# EAGLE board OpenBook_PCB (EAGLE 9.7.0)
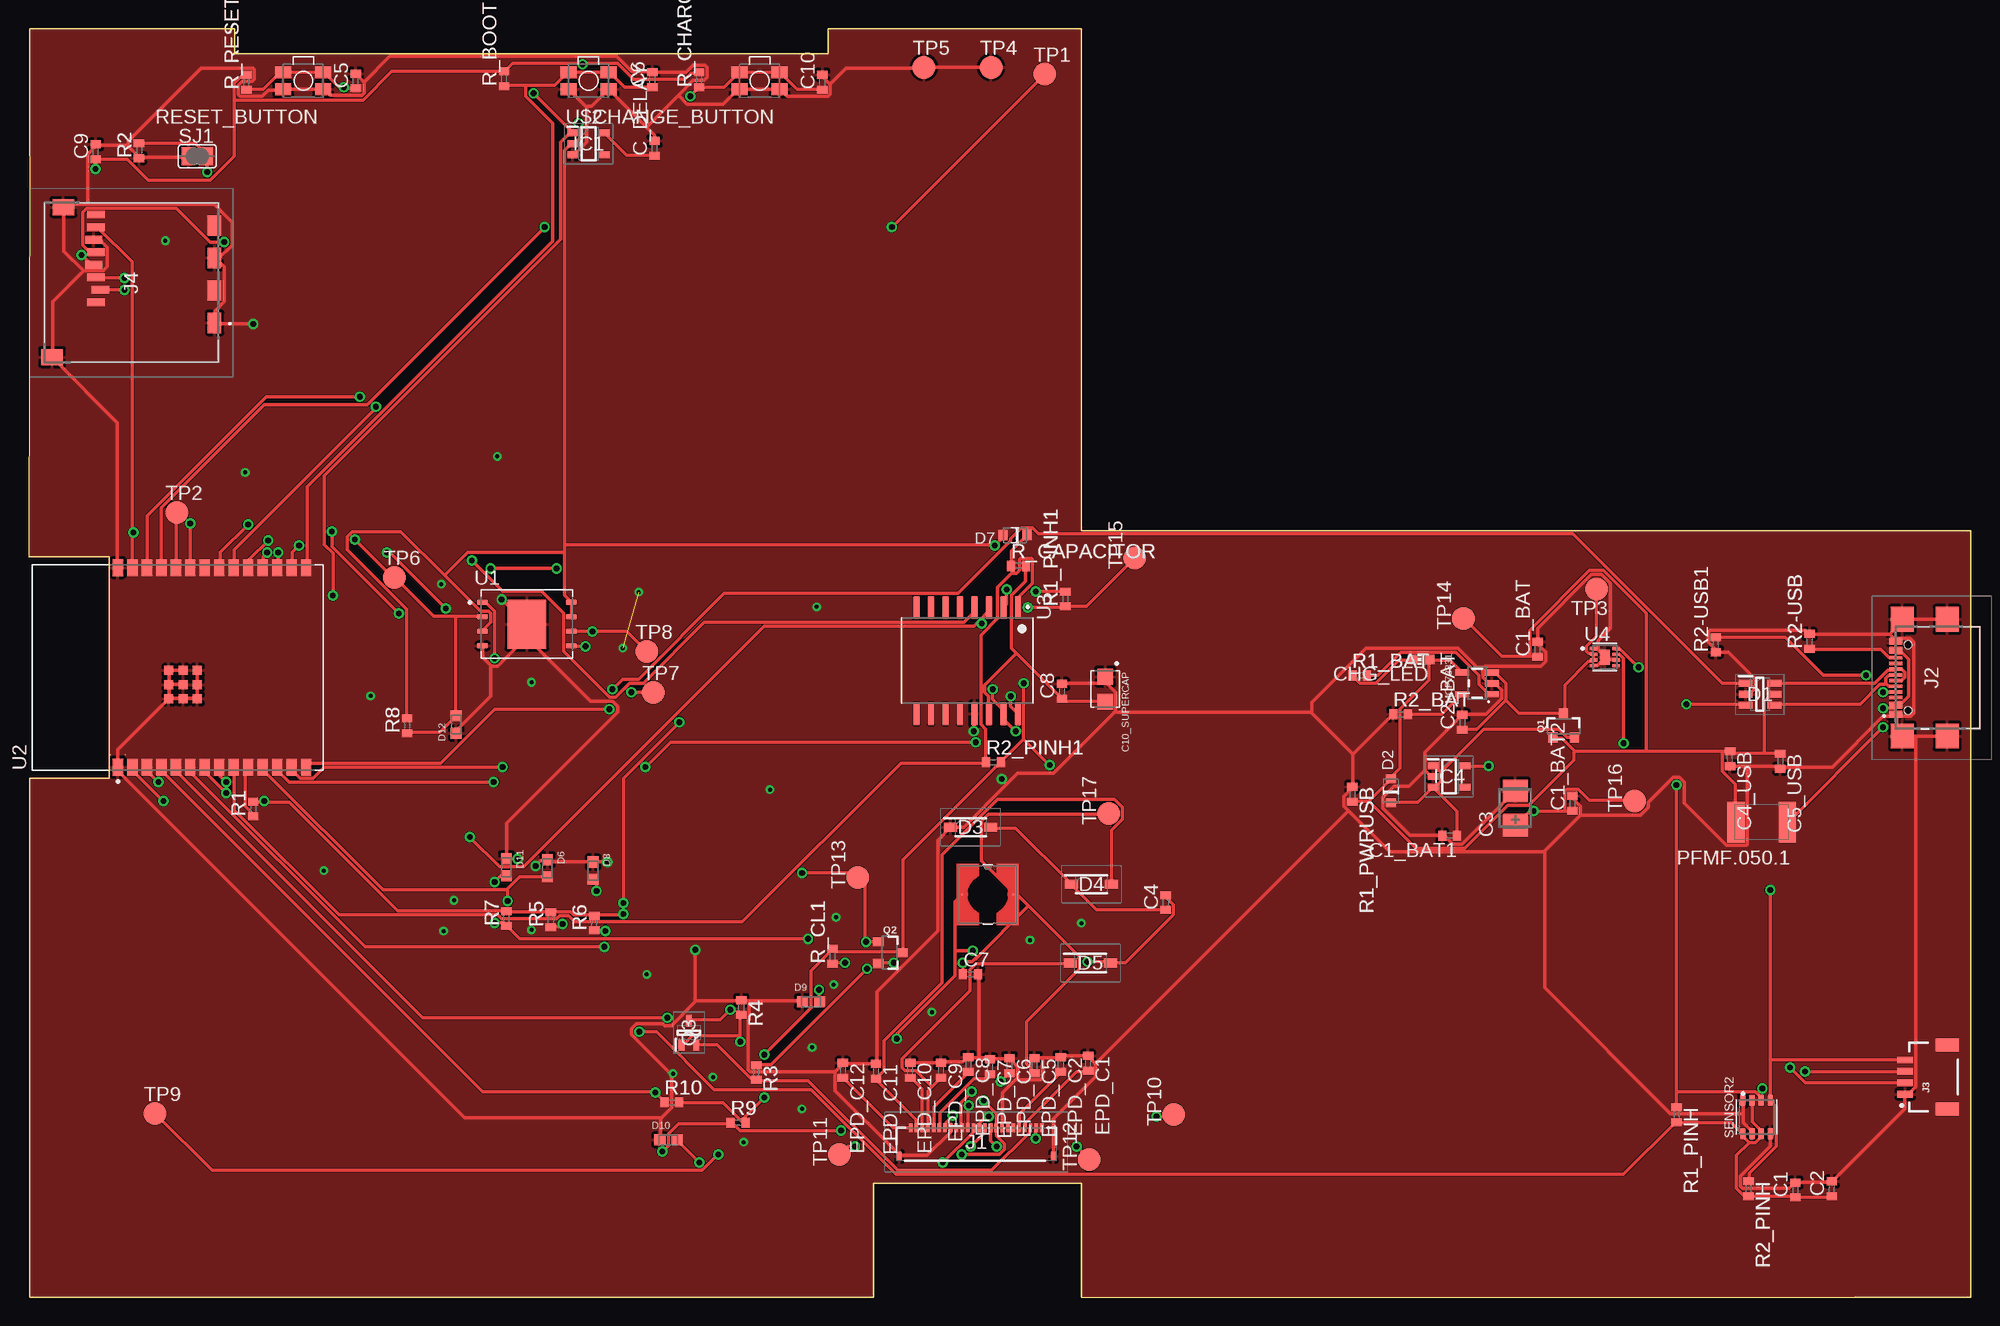
[diagram p0: board, top side]
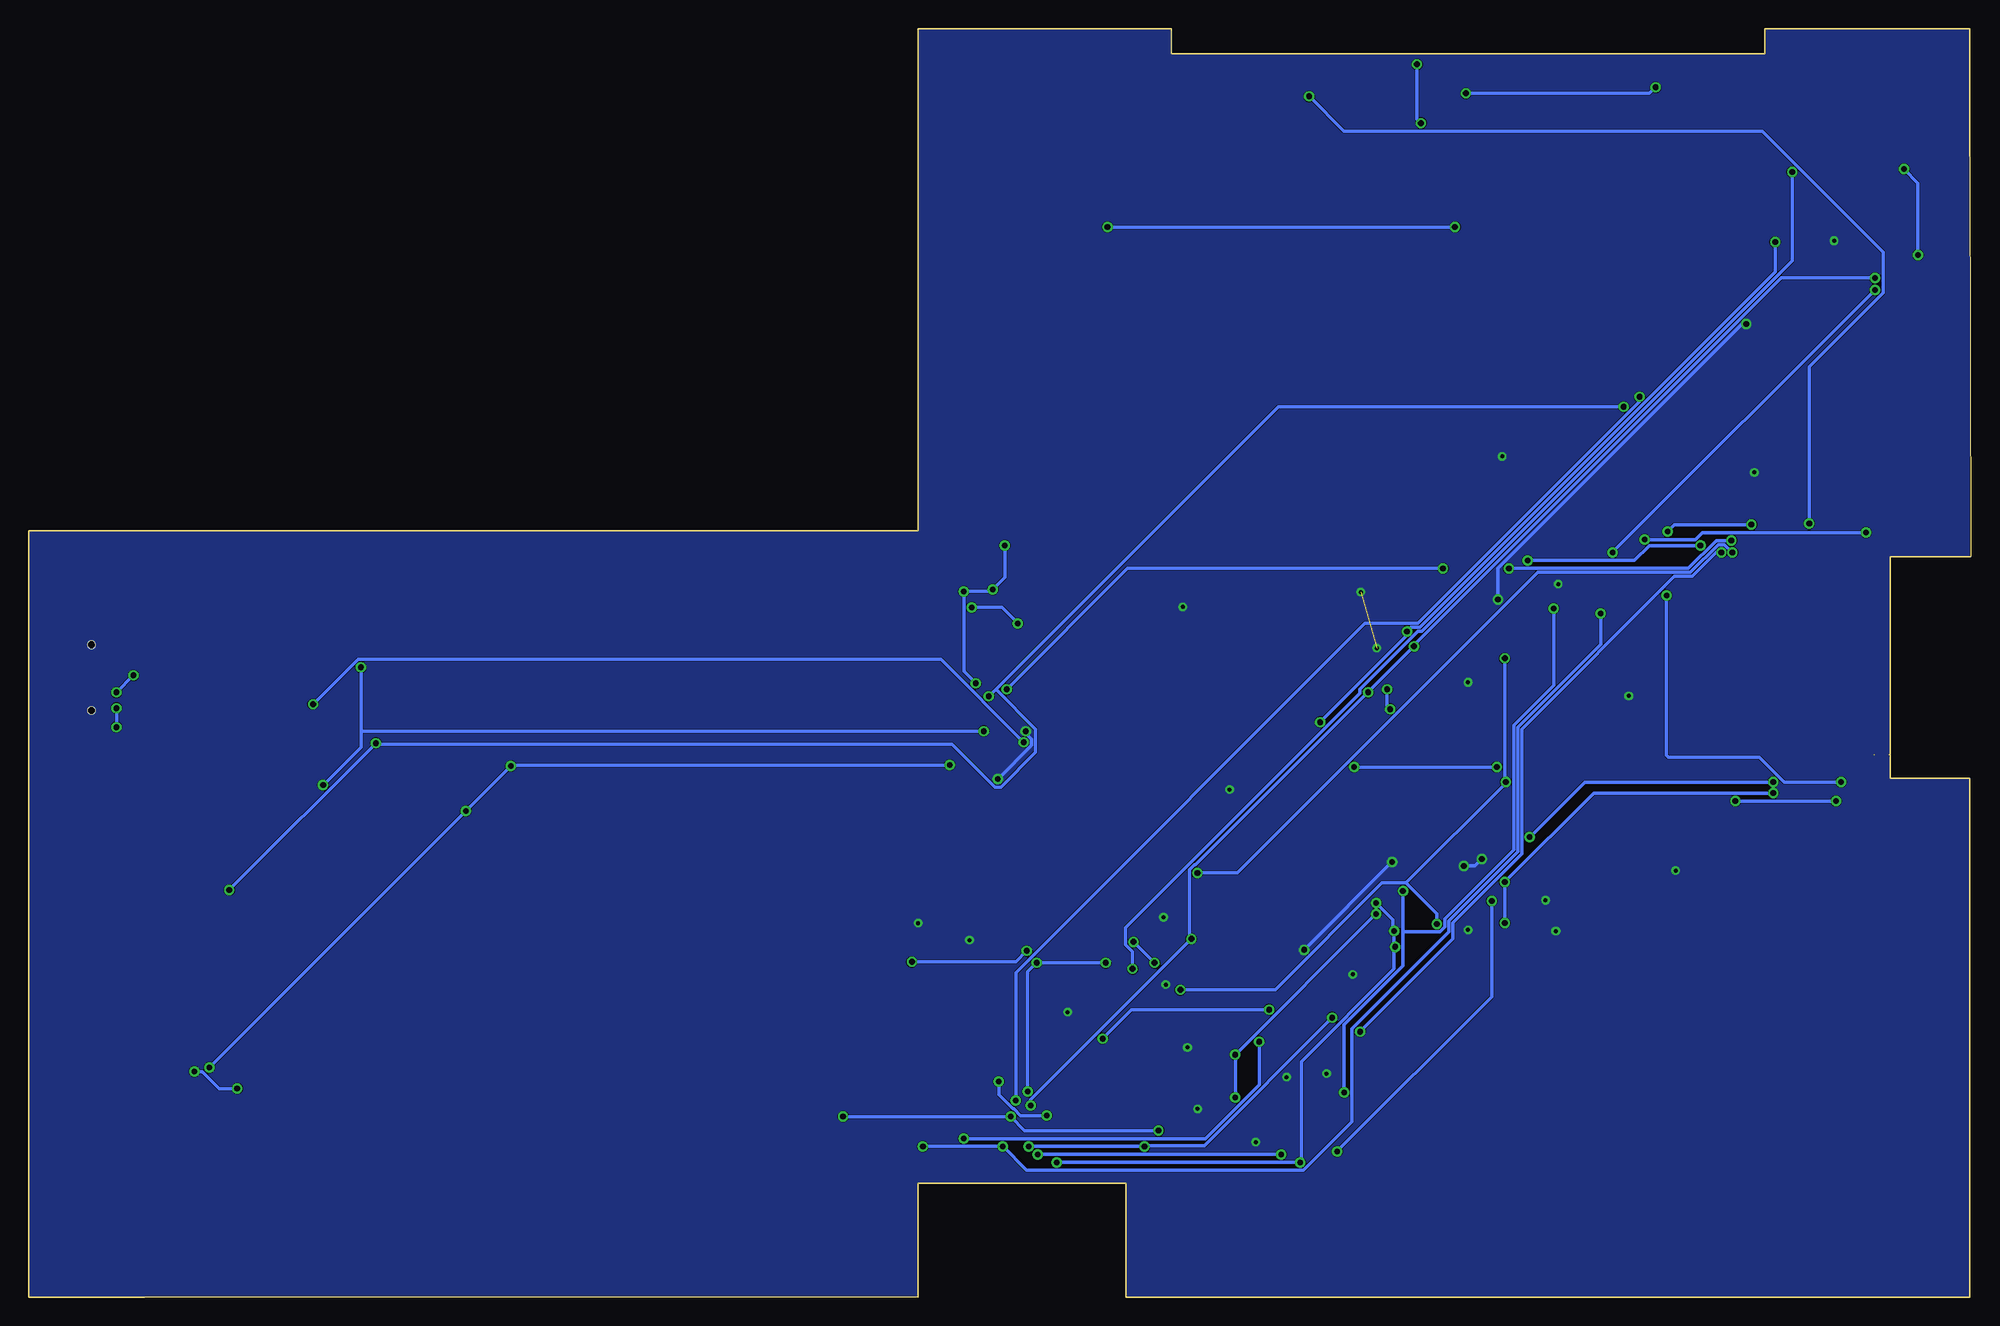
[diagram p1: board, bottom side, seen from below]

Size 170.29 x 111.2 mm. Coordinates in mm from the lower left corner, seen from the top.
Outline: 7.18,47.53 7.09,47.53
Outline: 8.48,47.53 8.49,47.53
Outline: 7.09,47.53 7.09,64.9 0,64.9 0.09,100 0.09,111.2 18.09,111.2 18.09,109 70.09,109 70.09,111.2 92.29,111.2 92.29,67.2 170.29,67.2 170.29,0 160.09,0 92.29,0 92.29,10 74.09,10 74.09,0 0.09,0 0.09,45.5 7.09,45.5 7.09,47.53
Copper layers (1*16): Top 0.035mm / dielectric 1.5mm / Bottom 0.035mm
Design rules "Fusion Electronics Design Rules *": minimum track width 0.3mm, minimum drill 0.2mm, track to track 0.05mm, track to pad 0.05mm, pad to pad 0.05mm, via to via 0.05mm, smd to smd 0.05mm, copper to edge 0mil, drill to drill 0.05mm, minimum pad ring 10mil, minimum via ring 8mil, stop-mask expansion 4mil, vias tented up to drill 9999mil, thermal gap 10mil
Net classes: 0 default: width 0.05 mm; 1 Power: width 0.15 mm; 2 Signal: width 0.15 mm

## Footprints (pad centres in the part's own frame; a part is rotated, then mirrored left to right if it is on the bottom)
ESP32_WROVER_EAGLE-LTSPICE_C0402 = smd 0.7 x 0.9: 1 -0.65,0; 2 0.65,0
RCL_CT3528 = smd 2 x 2.2: + -1.5,0; - 1.5,0
CAPCP3225X100N = smd 1.4 x 1.4: 1 -1.1,0; 2 1.1,0
MYBUTTON = smd 1.4 x 1.05: 1 1.75,0.75; 2 -1.75,0.75; 3 -1.75,-0.75; 4 1.75,-0.75
ADAFRUIT_CHIP-LED0603 = smd 0.8 x 0.8: A 0,-0.75; C 0,0.75
SOT95P280X145-6N = smd 1.2 x 0.6: 1 -1.25,0.95; 2 -1.25,0; 3 -1.25,-0.95; 4 1.25,-0.95; 5 1.25,0; 6 1.25,0.95
ESP32_WROVER_AVX---SD0805S020S1R0_AVX_SD0805S020S1R0_0 = smd 0.8 x 0.9: 1 -1.05,0; 2 1.05,0
SOD3716X135N = smd 1.15 x 0.8: 1 -1.75,0; 2 1.75,0
DIOC1608X36N = smd 0.97 x 0.94: 1 -0.75,0; 2 0.75,0
SOT95P280X125-5N = smd 0.9 x 0.6: 1 -1.4,0.95; 2 -1.4,0; 3 -1.4,-0.95; 4 1.4,-0.95; 5 1.4,0.95
SOT95P280X120-5N = smd 0.9 x 0.6: 1 -1.4,0.95; 2 -1.4,0; 3 -1.4,-0.95; 4 1.4,-0.95; 5 1.4,0.95
FH34SRJ24S05SH99 = smd 0.3 x 0.8: 1 5.75,1.45; 2 5.25,1.45; 3 4.75,1.45; 4 4.25,1.45; 5 3.75,1.45; 6 3.25,1.45; 7 2.75,1.45; 8 2.25,1.45; 9 1.75,1.45; 10 1.25,1.45; 11 0.75,1.45; 12 0.25,1.45; 13 -0.25,1.45; 14 -0.75,1.45; 15 -1.25,1.45; 16 -1.75,1.45; 17 -2.25,1.45; 18 -2.75,1.45; 19 -3.25,1.45; 20 -3.75,1.45; 21 -4.25,1.45; 22 -4.75,1.45; 23 -5.25,1.45; 24 -5.75,1.45 | smd 0.4 x 0.8: MP1 6.75,-1.05; MP2 -6.75,-1.05
SAMACSYS_PARTS_USB4110GFA = smd 0.3 x 1.15: A1 -3.35,3.678; A4 -2.55,3.678; A5 -1.25,3.678; A6 -0.25,3.678; A7 0.25,3.678; A8 1.25,3.678; A9 2.55,3.678; A12 3.35,3.678; B1 3.05,3.678; B4 2.25,3.678; B5 1.75,3.678; B6 0.75,3.678; B7 -0.75,3.678; B8 -1.75,3.678; B9 -2.25,3.678; B12 -3.05,3.678 | smd 2.18 x 2: MP1 -5.11,-0.827; MP2 5.11,-0.827; MP3 -5.11,3.103; MP4 5.11,3.103 | hole 0.65: -2.89,2.603; 2.89,2.603
JST04_1MM_RA = smd 0.6 x 1.35: 1 -1.5,0; 2 -0.5,0; 3 0.5,0; 4 1.5,0 | smd 1.2 x 2: NC1 2.8,-3.675; NC2 -2.8,-3.675
112ATAARR03ATTEND = smd 1.8 x 1.2: G1 10.6,10.4; G2 4.9,10.4; S1 7.75,10.4; S2 2.05,10.4 | smd 1.4 x 1.9: G3 13.6,-3.85; G4 0.45,-2.85 | smd 0.7 x 1.5: P1 8.8,0; P2 7.7,0.4; P3 6.6,0; P4 5.5,-0.2; P5 4.4,0; P6 3.3,-0.2; P7 2.2,0; P8 1.1,0
IND_4828-WE-TPC_WRE = smd 0.127 x 0.127: 1 -2.286,0; 2 2.286,0
ESP32_WROVER_SPARKFUN-IC-POWER_SOT23-5 = smd 0.55 x 1.2: 1 -0.95,-1.3; 2 0,-1.3; 3 0.95,-1.3; 4 0.95,1.3; 5 -0.95,1.3
ESP32C6_VARISTOR_CT/CN1812 = smd 1.5 x 3.6: 1 -2.25,0; 2 2.25,0
ESP32_WROVER_SPARKFUN-DISCRETESEMI_SOT23-3 = smd 0.8 x 0.9: 1 -0.95,-1; 2 0.95,-1; 3 0,1.1
SOT65P210X110-3N = smd 1.05 x 0.5: 1 -1.05,0.65; 2 -1.05,-0.65; 3 1.05,0
ESP32_WROVER_EAGLE-LTSPICE_R0402 = smd 0.7 x 0.9: 1 -0.65,0; 2 0.65,0
ESP32_WROVER_BME680_PSON80P300X300X100-8N = smd 1.016 x 0.5: 1 1.458,1.2; 2 1.458,0.4; 3 1.458,-0.4; 4 1.458,-1.2; 5 -1.458,-1.22; 6 -1.458,-0.4; 7 -1.458,0.4; 8 -1.458,1.2
SJ = smd 1.168 x 1.6: 1 -0.762,0; 2 0.762,0
TP20R = smd 2 x 2: TP 0,0
SON127P600X800X80-9N = smd 0.94 x 0.44: 1 -3.895,1.905; 2 -3.895,0.635; 3 -3.895,-0.635; 4 -3.895,-1.905; 5 3.895,-1.905; 6 3.895,-0.635; 7 3.895,0.635; 8 3.895,1.905 | smd 3.4 x 4.3: 9 0,0
XCVR_ESP32-C6-WROOM-1-N8 = smd 1.5 x 0.9: 1 -8.75,5.26; 2 -8.75,3.99; 3 -8.75,2.72; 4 -8.75,1.45; 5 -8.75,0.18; 6 -8.75,-1.09; 7 -8.75,-2.36; 8 -8.75,-3.63; 9 -8.75,-4.9; 10 -8.75,-6.17; 11 -8.75,-7.44; 12 -8.75,-8.71; 13 -8.75,-9.98; 14 -8.75,-11.25; 15 8.75,-11.25; 16 8.75,-9.98; 17 8.75,-8.71; 18 8.75,-7.44; 19 8.75,-6.17; 20 8.75,-4.9; 21 8.75,-3.63; 22 8.75,-2.36; 23 8.75,-1.09; 24 8.75,0.18; 25 8.75,1.45; 26 8.75,2.72; 27 8.75,3.99; 28 8.75,5.26 | smd 0.8 x 0.8: 29_1 -2.755,0.79; 29_2 -1.505,0.79; 29_3 -0.255,0.79; 29_4 -2.755,-0.46; 29_5 -1.505,-0.46; 29_6 -0.255,-0.46; 29_7 -2.755,-1.71; 29_8 -1.505,-1.71; 29_9 -0.255,-1.71
SOIC127P1032X265-16N = smd 2.05 x 0.59: 1 -4.655,4.445; 2 -4.655,3.175; 3 -4.655,1.905; 4 -4.655,0.635; 5 -4.655,-0.635; 6 -4.655,-1.905; 7 -4.655,-3.175; 8 -4.655,-4.445; 9 4.655,-4.445; 10 4.655,-3.175; 11 4.655,-1.905; 12 4.655,-0.635; 13 4.655,0.635; 14 4.655,1.905; 15 4.655,3.175; 16 4.655,4.445
SON50P200X200X80-9N = smd 0.76 x 0.27: 1 -0.985,0.75; 2 -0.985,0.25; 3 -0.985,-0.25; 4 -0.985,-0.75; 5 0.985,-0.75; 6 0.985,-0.25; 7 0.985,0.25; 8 0.985,0.75 | smd 0.9 x 1.3: 9 0,0

## Placement (x,y rotation side)
C1  100nF  [ESP32_WROVER_EAGLE-LTSPICE_C0402]  154.89,9.4 90 top
C1_BAT  4.7uF  [ESP32_WROVER_EAGLE-LTSPICE_C0402]  132.29,56.8 90 top
C1_BAT1  4.7uF  [ESP32_WROVER_EAGLE-LTSPICE_C0402]  124.59,40.45 180 top
C1_BAT2  4.7uF  [ESP32_WROVER_EAGLE-LTSPICE_C0402]  135.35,43.3 90 top
C2  100nF  [ESP32_WROVER_EAGLE-LTSPICE_C0402]  158.09,9.5 90 top
C2_BAT  4.7uF  [ESP32_WROVER_EAGLE-LTSPICE_C0402]  125.69,50.4 90 top
C3  100uF TANT  [RCL_CT3528]  130.33,42.87 90 top
C4  4.7uF/25V  [ESP32_WROVER_EAGLE-LTSPICE_C0402]  99.69,34.6 90 top
C4_USB  100nF  [ESP32_WROVER_EAGLE-LTSPICE_C0402]  149.16,47.2 270 top
C5  1uF  [ESP32_WROVER_EAGLE-LTSPICE_C0402]  28.69,106.6 90 top
C5_USB  4.7uF  [ESP32_WROVER_EAGLE-LTSPICE_C0402]  153.56,46.99 270 top
C6  100nF  [ESP32_WROVER_EAGLE-LTSPICE_C0402]  54.69,106.7 90 top
C7  10uF  [ESP32_WROVER_EAGLE-LTSPICE_C0402]  82.59,28.3 0 top
C8  100nF  [ESP32_WROVER_EAGLE-LTSPICE_C0402]  90.59,53.1 90 top
C9  100nF  [ESP32_WROVER_EAGLE-LTSPICE_C0402]  5.89,100.4 90 top
C10  100nF  [ESP32_WROVER_EAGLE-LTSPICE_C0402]  69.59,106.5 90 top
C10_SUPERCAP  CPH3225A  [CAPCP3225X100N]  94.39,53.3 270 top
C_DELAY  100nF  [ESP32_WROVER_EAGLE-LTSPICE_C0402]  54.89,100.7 90 top
CHANGE_BUTTON  BUTTON_CUSYOMV1  [MYBUTTON]  64.09,106.63 180 top
CHG_LED  [ADAFRUIT_CHIP-LED0603]  122.09,55.9 90 top
D1  USBLC6-2SC6Y  [SOT95P280X145-6N]  151.79,52.85 0 top
D2  ESP32_WROVER_AVX---SD0805S020S1R0_AVX_SD0805S020S1R0_0_0AVX_SD0805S020S1R0_0_0  [ESP32_WROVER_AVX---SD0805S020S1R0_AVX_SD0805S020S1R0_0]  119.44,44.4 90 top
D3  MBR0530  [SOD3716X135N]  82.59,41.2 0 top
D4  MBR0530  [SOD3716X135N]  93.19,36.2 0 top
D5  MBR0530  [SOD3716X135N]  93.09,29.3 0 top
D6  PGB1010603MR  [DIOC1608X36N]  45.49,37.6 270 top
D7  ESP32_WROVER_AVX---SD0805S020S1R0_AVX_SD0805S020S1R0_0_0AVX_SD0805S020S1R0_0_0  [ESP32_WROVER_AVX---SD0805S020S1R0_AVX_SD0805S020S1R0_0]  86.49,66.8 180 top
D8  PGB1010603MR  [DIOC1608X36N]  49.49,37.4 270 top
D9  PGB1010603MR  [DIOC1608X36N]  68.59,25.9 0 top
D10  PGB1010603MR  [DIOC1608X36N]  56.09,13.8 0 top
D11  PGB1010603MR  [DIOC1608X36N]  41.89,37.7 270 top
D12  PGB1010603MR  [DIOC1608X36N]  37.49,50.2 90 top
EPD_C1  1uF/50V  [ESP32_WROVER_EAGLE-LTSPICE_C0402]  92.89,20.5 270 top
EPD_C2  1uF/50V  [ESP32_WROVER_EAGLE-LTSPICE_C0402]  90.49,20.4 270 top
EPD_C5  0.1uF/50V  [ESP32_WROVER_EAGLE-LTSPICE_C0402]  88.19,20.3 270 top
EPD_C6  1uF/50V  [ESP32_WROVER_EAGLE-LTSPICE_C0402]  85.99,20.3 270 top
EPD_C7  1uF/50V  [ESP32_WROVER_EAGLE-LTSPICE_C0402]  84.29,20.2 270 top
EPD_C8  1uF/50V  [ESP32_WROVER_EAGLE-LTSPICE_C0402]  82.39,20.4 270 top
EPD_C9  1uF/50V  [ESP32_WROVER_EAGLE-LTSPICE_C0402]  79.99,19.9 270 top
EPD_C10  1uF/50V  [ESP32_WROVER_EAGLE-LTSPICE_C0402]  77.29,19.9 270 top
EPD_C11  1uF/50V  [ESP32_WROVER_EAGLE-LTSPICE_C0402]  74.29,19.8 270 top
EPD_C12  1uF/50V  [ESP32_WROVER_EAGLE-LTSPICE_C0402]  71.39,19.9 270 top
IC1  BD5229G-TR  [SOT95P280X125-5N]  49.09,101.1 0 top
IC4  XC6220A331MR-G  [SOT95P280X120-5N]  124.54,45.64 0 top
J1  FH34SRJ-24S-0.5SH_99_  [FH34SRJ24S05SH99]  83.09,13.4 0 top
J2  SAMACSYS_PARTS_USB4110-GF-A  [SAMACSYS_PARTS_USB4110GFA]  167.38,54.3 90 top
J3  QWIIC_RIGHT_ANGLE  [JST04_1MM_RA]  164.53,19.3 90 top
J4  112A-TAAR-R03_ATTEND  [112ATAARR03ATTEND]  5.91,96 270 top
L1  68uH  [IND_4828-WE-TPC_WRE]  84.09,35.3 0 top
MCP73831  ESP32_WROVER_SPARKFUN-IC-POWER_MCP73831  [ESP32_WROVER_SPARKFUN-IC-POWER_SOT23-5]  126.99,53.8 90 top
PFMF.050.1  ESP32C6_VARISTORCN1812  [ESP32C6_VARISTOR_CT/CN1812]  151.94,41.65 180 top
Q1  20V/4.2A/52mΩ/1.4W  [ESP32_WROVER_SPARKFUN-DISCRETESEMI_SOT23-3]  134.57,50.06 0 top
Q2  20V/4.2A/52mΩ/1.4W  [ESP32_WROVER_SPARKFUN-DISCRETESEMI_SOT23-3]  75.49,30.2 270 top
Q3  SI1308EDL-T1-GE3  [SOT65P210X110-3N]  57.89,23.2 90 top
R1  10K  [ESP32_WROVER_EAGLE-LTSPICE_R0402]  19.69,42.8 90 top
R1_BAT  200  [ESP32_WROVER_EAGLE-LTSPICE_R0402]  116.69,54.5 0 top
R1_PINH  10K  [ESP32_WROVER_EAGLE-LTSPICE_R0402]  144.49,16 270 top
R1_PINH1  10K  [ESP32_WROVER_EAGLE-LTSPICE_R0402]  90.89,61.2 90 top
R1_PWRUSB  100K  [ESP32_WROVER_EAGLE-LTSPICE_R0402]  116.05,44.1 270 top
R2  2.2  [ESP32_WROVER_EAGLE-LTSPICE_R0402]  9.69,100.5 90 top
R2-USB  5k1  [ESP32_WROVER_EAGLE-LTSPICE_R0402]  156.14,57.49 90 top
R2-USB1  5k1  [ESP32_WROVER_EAGLE-LTSPICE_R0402]  147.92,57.19 90 top
R2_BAT  2K  [ESP32_WROVER_EAGLE-LTSPICE_R0402]  120.29,51.1 0 top
R2_PINH  10K  [ESP32_WROVER_EAGLE-LTSPICE_R0402]  150.79,9.5 270 top
R2_PINH1  10K  [ESP32_WROVER_EAGLE-LTSPICE_R0402]  84.59,46.9 0 top
R3  0.47  [ESP32_WROVER_EAGLE-LTSPICE_R0402]  63.79,19.7 270 top
R4  10K  [ESP32_WROVER_EAGLE-LTSPICE_R0402]  62.49,25.4 270 top
R5  10K  [ESP32_WROVER_EAGLE-LTSPICE_R0402]  45.79,33.1 90 top
R6  10K  [ESP32_WROVER_EAGLE-LTSPICE_R0402]  49.59,32.8 90 top
R7  10K  [ESP32_WROVER_EAGLE-LTSPICE_R0402]  41.89,33.2 90 top
R8  10K  [ESP32_WROVER_EAGLE-LTSPICE_R0402]  33.19,50.1 90 top
R9  10K  [ESP32_WROVER_EAGLE-LTSPICE_R0402]  62.19,15.3 0 top
R10  10K  [ESP32_WROVER_EAGLE-LTSPICE_R0402]  56.39,17.1 0 top
R_BOOT  10K  [ESP32_WROVER_EAGLE-LTSPICE_R0402]  41.69,106.8 90 top
R_CAPACITOR  15  [ESP32_WROVER_EAGLE-LTSPICE_R0402]  86.79,64.1 0 top
R_CHARGE  10K  [ESP32_WROVER_EAGLE-LTSPICE_R0402]  58.79,106.7 90 top
R_CL1  10K  [ESP32_WROVER_EAGLE-LTSPICE_R0402]  70.49,29.9 90 top
R_RESET  10K  [ESP32_WROVER_EAGLE-LTSPICE_R0402]  19.09,106.5 90 top
RESET_BUTTON  BUTTON_CUSYOMV1  [MYBUTTON]  24.09,106.63 180 top
SENSOR2  ESP32_WROVER_BME680_BME680  [ESP32_WROVER_BME680_PSON80P300X300X100-8N]  151.49,15.8 90 top
SJ1  [SJ]  14.79,100 0 top
TP1  TPTP20R  [TP20R]  89.09,107.2 0 top
TP2  TPTP20R  [TP20R]  12.99,68.8 0 top
TP3  TPTP20R  [TP20R]  137.49,62.06 180 top
TP4  TPTP20R  [TP20R]  84.39,107.8 0 top
TP5  TPTP20R  [TP20R]  78.49,107.8 0 top
TP6  TPTP20R  [TP20R]  32.09,63.1 0 top
TP7  TPTP20R  [TP20R]  54.79,53 0 top
TP8  TPTP20R  [TP20R]  54.19,56.6 0 top
TP9  TPTP20R  [TP20R]  11.09,16.1 0 top
TP10  TPTP20R  [TP20R]  100.39,16 90 top
TP11  TPTP20R  [TP20R]  71.09,12.5 90 top
TP12  TPTP20R  [TP20R]  92.99,12.09 90 top
TP13  TPTP20R  [TP20R]  72.69,36.8 90 top
TP14  TPTP20R  [TP20R]  125.79,59.5 90 top
TP15  TPTP20R  [TP20R]  96.99,64.8 90 top
TP16  TPTP20R  [TP20R]  140.79,43.5 90 top
TP17  TPTP20R  [TP20R]  94.69,42.4 90 top
U1  W25Q512JVEIQ  [SON127P600X800X80-9N]  43.69,59 0 top
U2  ESP32-C6-WROOM-1-N8  [XCVR_ESP32-C6-WROOM-1-N8]  13.09,55.2 90 top
U3  DS3231SN#  [SOIC127P1032X265-16N]  82.29,55.8 270 top
U4  MAX17048G+T10  [SON50P200X200X80-9N]  138.19,56.1 0 top
U$2  BUTTON_CUSYOMV1  [MYBUTTON]  49.09,106.63 180 top

## Library data of the parts
C1 C1_BAT C1_BAT1 C1_BAT2 C2 C2_BAT C4 C4_USB C5 C5_USB C6-C10 C_DELAY EPD_C1 EPD_C2 EPD_C5-EPD_C12 = DeskAssistant v19 v1; SPICEMODEL: NONE; SPICEPREFIX: C
C3 = DeskAssistant v19 v1; SPICEPREFIX: C
C10_SUPERCAP = DeskAssistant v19 v1; AVAILABILITY: Not in stock; CHECK_PRICES: https://www.snapeda.com/parts/CPH3225A/Seiko+Instruments/view-part/?ref=eda; DESCRIPTION: 11 mF (EDLC) Supercapacitor 3.3 V 1210 (3225 Metric) - -; MF: Seiko Instruments; MP: CPH3225A; PACKAGE: 1210 Seiko; PRICE: None; PURCHASE-URL: https://www.snapeda.com/api/url_track_click_mouser/?unipart_id=562593&manufacturer=Seiko Instruments&part_name=CPH3225A&search_term=None; SNAPEDA_LINK: https://www.snapeda.com/parts/CPH3225A/Seiko+Instruments/view-part/?ref=snap
CHANGE_BUTTON CHG_LED PFMF.050.1 RESET_BUTTON SJ1 TP1-TP17 U$2 = DeskAssistant v19 v1
D1 = DeskAssistant v19 v1; AVAILABILITY: In Stock; CHECK_PRICES: https://www.snapeda.com/parts/USBLC6-2SC6Y/STMicroelectronics/view-part/?ref=eda; DESCRIPTION: 17V Clamp 5A (8/20µs) Ipp Tvs Diode Surface Mount SOT-23-6; MF: STMicroelectronics; MP: USBLC6-2SC6Y; PACKAGE: SOT-23-6 STMicroelectronics; PRICE: None; SNAPEDA_LINK: https://www.snapeda.com/parts/USBLC6-2SC6Y/STMicroelectronics/view-part/?ref=snap
D2 D7 = DeskAssistant v19 v1; CENTROID_NOT_SPECIFIED: No; DATASHEET: http://datasheets.avx.com/schottky.pdf; DIGIKEY_DESCRIPTION: DIODE SCHOTTKY 20V 1A 0805; DIGIKEY_PART_NUMBER: 478-7800-1-ND; LEAD_FREE: yes; MF: AVX; MOUSER_PART_NUMBER: 581-SD0805S020S1R0; PACKAGE: 0805 (2012 metric); PREFIX: D; ROHS: yes; TEMPERATURE_RANGE_HIGH: +125°C; TEMPERATURE_RANGE_LOW: -55°C
D3-D5 = DeskAssistant v19 v1; AVAILABILITY: In Stock; CHECK_PRICES: https://www.snapeda.com/parts/MBR0530/Onsemi/view-part/?ref=eda; DESCRIPTION: Diode Schottky 30 V 500mA Surface Mount SOD-123; MF: ON Semiconductor; MP: MBR0530; PACKAGE: SOD-123-2 ON Semiconductor; PRICE: None; PURCHASE-URL: https://www.snapeda.com/api/url_track_click_mouser/?unipart_id=179458&manufacturer=ON Semiconductor&part_name=MBR0530&search_term=None; SNAPEDA_LINK: https://www.snapeda.com/parts/MBR0530/Onsemi/view-part/?ref=snap
D6 D8-D12 = DeskAssistant v19 v1; AVAILABILITY: In Stock; CHECK_PRICES: https://www.snapeda.com/parts/PGB1010603MR/Littelfuse/view-part/?ref=eda; DESCRIPTION: 150V (Typ) Clamp - Ipp Tvs Diode Surface Mount 0603 (1608 Metric); MF: Littelfuse Inc.; MP: PGB1010603MR; PACKAGE: 0603 Littelfuse Inc.; PRICE: None; PURCHASE-URL: https://www.snapeda.com/api/url_track_click_mouser/?unipart_id=5659453&manufacturer=Littelfuse Inc.&part_name=PGB1010603MR&search_term=None; SNAPEDA_LINK: https://www.snapeda.com/parts/PGB1010603MR/Littelfuse/view-part/?ref=snap
IC1 = DeskAssistant v19 v1; DESCRIPTION: Voltage Detector with Adjustable Delay Time: CMOS processes are utilized to develop high precision, low current consumption CMOS reset ICs that allow arbitrary setting of the delay time. The extensive lineup includes both Nch Open Drain and CMOS output types in a wide range of detection voltages (from 2.3V to 6.0V, in 0.1V steps), enabling selection of the ideal solution based on customer requirements. In addition, the entire series is of course both lead-free and RoHS-compliant.; HEIGHT: 1.25mm; MANUFACTURER_NAME: ROHM Semiconductor; MANUFACTURER_PART_NUMBER: BD5229G-TR; MOUSER_PART_NUMBER: 755-BD5229G-TR; MOUSER_PRICE-STOCK: https://www.mouser.co.uk/ProductDetail/ROHM-Semiconductor/BD5229G-TR?qs=4kLU8WoGk0vvnhrrYwdszw%3D%3D
IC4 = DeskAssistant v19 v1; DESCRIPTION: LDO Voltage Regulators; HEIGHT: 1.2mm; MANUFACTURER_NAME: Torex; MANUFACTURER_PART_NUMBER: XC6220A331MR-G; MOUSER_PART_NUMBER: 865-XC6220A331MR-G; MOUSER_PRICE-STOCK: https://www.mouser.co.uk/ProductDetail/Torex-Semiconductor/XC6220A331MR-G?qs=AsjdqWjXhJ8ZSWznL1J0gg%3D%3D
J1 = DeskAssistant v19 v1; DESCRIPTION: 24 Position FFC, FPC Connector Contacts, Top and Bottom 0.020" (0.50mm) Surface Mount, Right Angle; HEIGHT: 1.1mm; MANUFACTURER_NAME: Hirose; MANUFACTURER_PART_NUMBER: FH34SRJ-24S-0.5SH(99); MOUSER_PART_NUMBER: 798-FH34SRJ24S05SH99; MOUSER_PRICE-STOCK: https://www.mouser.co.uk/ProductDetail/Hirose-Connector/FH34SRJ-24S-0.5SH99?qs=vcbW%252B4%252BSTIpKBl5ap9J8Fw%3D%3D
J2 = DeskAssistant v19 v1; DESCRIPTION: CONN USB 2.0 TYPE-C R/A SMT; HEIGHT: 3.26mm; MANUFACTURER_NAME: GCT (GLOBAL CONNECTOR TECHNOLOGY); MANUFACTURER_PART_NUMBER: USB4110-GF-A; MOUSER_PART_NUMBER: 640-USB4110-GF-A; MOUSER_PRICE-STOCK: https://www.mouser.co.uk/ProductDetail/GCT/USB4110-GF-A?qs=KUoIvG%2F9IlYiZvIXQjyJeA%3D%3D
J3 = DeskAssistant v19 v1; PROD_ID: CONN-13694
J4 = DeskAssistant v19 v1; DESCRIPTION: Micro SD Card Socket, Push-Push Type, Top Mount, SMT, H=1.83mm, 10u; HEIGHT: 1.9mm; MANUFACTURER_NAME: ATTEND; MANUFACTURER_PART_NUMBER: 112A-TAAR-R03 ATTEND
L1 = DeskAssistant v19 v1; COPYRIGHT: Copyright (C) 2024 Ultra Librarian. All rights reserved.; MANUFACTURER_PART_NUMBER: 744043680; MFR_NAME: Wurth Electronics
MCP73831 = DeskAssistant v19 v1; PROD_ID: IC-09995
Q1 Q2 = DeskAssistant v19 v1; PROD_ID: TRAN-14388
Q3 = DeskAssistant v19 v1; AVAILABILITY: In Stock; CHECK_PRICES: https://www.snapeda.com/parts/SI1308EDL-T1-GE3/Vishay+Siliconix/view-part/?ref=eda; DESCRIPTION: Si1308EDL-T1-GE3 N-channel MOSFET Transistor, 1.5 A, 30 V, 3-Pin SC-70 | Siliconix / Vishay SI1308EDL-T1-GE3; MF: Vishay Siliconix; MP: SI1308EDL-T1-GE3; PACKAGE: SOT-323 Vishay Semiconductor; PRICE: None; PURCHASE-URL: https://www.snapeda.com/api/url_track_click_mouser/?unipart_id=274603&manufacturer=Vishay Siliconix&part_name=SI1308EDL-T1-GE3&search_term=None; SNAPEDA_LINK: https://www.snapeda.com/parts/SI1308EDL-T1-GE3/Vishay+Siliconix/view-part/?ref=snap
R1 R1_BAT R1_PINH R1_PINH1 R1_PWRUSB R2 R2-USB R2-USB1 R2_BAT R2_PINH R2_PINH1 R3-R10 R_BOOT R_CAPACITOR R_CHARGE R_CL1 R_RESET = DeskAssistant v19 v1; SPICEMODEL: NONE; SPICEPREFIX: R
SENSOR2 = DeskAssistant v19 v1; AVAILABILITY: Unavailable; DESCRIPTION: Integrated Environmental Unit; MF: Bosch Sensortec; MP: BME680; PACKAGE: LGA-8 Bosch Tools; PRICE: None
U1 = DeskAssistant v19 v1; AVAILABILITY: In Stock; CHECK_PRICES: https://www.snapeda.com/parts/W25Q512JVEIQ/Winbond+Electronics/view-part/?ref=eda; DESCRIPTION: FLASH - NOR Memory IC 512Mb (64M x 8) SPI - Quad I/O 133 MHz 8-WSON (8x6); MF: Winbond Electronics; MP: W25Q512JVEIQ; PACKAGE: Package; PRICE: None; SNAPEDA_LINK: https://www.snapeda.com/parts/W25Q512JVEIQ/Winbond+Electronics/view-part/?ref=snap
U2 = DeskAssistant v19 v1; AVAILABILITY: In Stock; CHECK_PRICES: https://www.snapeda.com/parts/ESP32-C6-WROOM-1-N8/Espressif+Systems/view-part/?ref=eda; DESCRIPTION: Multiprotocol Modules ESP32-C6 module, Wi-Fi 6 in 2.4 GHz band, Bluetooth 5, Zigbee 3.0 and Thread. ESP34-WROOM Compatible - ENGINEERING SAMPLE; MF: Espressif Systems; MP: ESP32-C6-WROOM-1-N8; PACKAGE: None; PRICE: None; SNAPEDA_LINK: https://www.snapeda.com/parts/ESP32-C6-WROOM-1-N8/Espressif+Systems/view-part/?ref=snap
U3 = DeskAssistant v19 v1; AVAILABILITY: In Stock; CHECK_PRICES: https://www.snapeda.com/parts/DS3231SN%23/Analog+Devices/view-part/?ref=eda; DESCRIPTION: Extremely Accurate I²C-Integrated RTC/TCXO/Crystal; MF: Analog Devices; MP: DS3231SN#; PACKAGE: SOIC-16 Maxim; PRICE: None; PURCHASE-URL: https://www.snapeda.com/api/url_track_click_mouser/?unipart_id=99048&manufacturer=Analog Devices&part_name=DS3231SN#&search_term=None; SNAPEDA_LINK: https://www.snapeda.com/parts/DS3231SN%23/Analog+Devices/view-part/?ref=snap
U4 = DeskAssistant v19 v1; AVAILABILITY: In Stock; CHECK_PRICES: https://www.snapeda.com/parts/MAX17048G+T10/Analog+Devices/view-part/?ref=eda; DESCRIPTION: 3µA 1-Cell/2-Cell Fuel Gauge with ModelGauge; MF: Analog Devices; MP: MAX17048G+T10; PACKAGE: TDFN-8 Maxim; PRICE: None; PURCHASE-URL: https://www.snapeda.com/api/url_track_click_mouser/?unipart_id=329239&manufacturer=Analog Devices&part_name=MAX17048G+T10&search_term=None; SNAPEDA_LINK: https://www.snapeda.com/parts/MAX17048G+T10/Analog+Devices/view-part/?ref=snap

## Nets
3V3 [Power]: C1_BAT2.1 C3.+ C9.1 D7.2 IC1.2 IC4.5 J3.2 J4.P4 Q2.3 R1.2 R1_PINH1.2 R2_PINH1.2 R5.2 R6.2 R7.2 R8.2 R9.2 R10.2 R_BOOT.2 R_CHARGE.2 R_CL1.2 R_RESET.2 TP16.TP U1.3 U1.7 U1.8 U2.2 U3.2
32KHZ [Signal]: R2_PINH1.1 U2.9 U3.1
DN [Signal]: D1.4 J2.A7 J2.B7
DP [Signal]: D1.6 J2.A6 J2.B6
EPD_3V3 [Signal]: C7.1 EPD_C5.2 J1.15 J1.16 L1.2 Q2.2 TP17.TP
EPD_3V3_C [Signal]: Q2.1 R_CL1.1 TP13.TP U2.18
EPD_BUSY [Signal]: J1.9 TP9.TP U2.26
EPD_CS [Signal]: D6.2 J1.12 R9.1 TP10.TP U2.11
EPD_DC [Signal]: J1.11 TP11.TP U2.5
EPD_RST [Signal]: J1.10 TP12.TP U2.21
FLASH_CS [Signal]: D9.2 R5.1 U1.1 U2.12
GDR [Signal]: J1.2 Q3.1 R4.2
GND [Power]: C1.2 C1_BAT1.2 C1_BAT2.2 C1_BAT.2 C2.2 C2_BAT.2 C3.- C4_USB.2 C5.2 C5_USB.2 C6.2 C7.2 C8.2 C9.2 C10.2 C10_SUPERCAP.1 C_DELAY.2 CHANGE_BUTTON.1 CHANGE_BUTTON.2 D1.2 D3.1 D6.1 D8.1 D9.1 D10.1 D11.1 D12.1 EPD_C1.1 EPD_C2.1 EPD_C5.1 EPD_C6.1 EPD_C7.1 EPD_C8.1 EPD_C9.1 EPD_C10.1 EPD_C11.1 EPD_C12.1 IC1.3 IC4.2 J1.8 J1.17 J1.MP1 J1.MP2 J2.A1 J2.A12 J2.B1 J2.B12 J2.MP1 J2.MP2 J2.MP3 J2.MP4 J3.1 J4.G1 J4.G2 J4.G3 J4.G4 J4.P6 MCP73831.2 R1_PWRUSB.1 R2-USB1.1 R2-USB.2 R2.1 R2_BAT.1 R4.1 RESET_BUTTON.1 RESET_BUTTON.2 SENSOR2.1 SENSOR2.5 SENSOR2.7 SJ1.1 TP4.TP TP5.TP U1.4 U1.9 U2.1 U2.28 U2.29_1 U2.29_2 U2.29_3 U2.29_4 U2.29_5 U2.29_6 U2.29_7 U2.29_8 U2.29_9 U3.13 U4.1 U4.4 U4.6 U4.9 U$2.1 U$2.2
GPIO8 [Signal]: R1.1 U2.10
I2C_PW [Signal]: C1.1 C2.1 R1_PINH.2 R2_PINH.2 SENSOR2.2 SENSOR2.6 SENSOR2.8 U2.17
INT_RTC [Signal]: R1_PINH1.1 TP15.TP U2.8 U3.3
IO/BOOT [Signal]: C6.1 R_BOOT.1 U2.15 U$2.3 U$2.4
IO/CHARGE [Signal]: C10.1 CHANGE_BUTTON.3 CHANGE_BUTTON.4 R_CHARGE.1 U2.23
MISO [Signal]: D12.2 J4.P7 R8.1 TP6.TP U1.2 U2.27
MOSI [Signal]: D11.2 J1.14 J4.P3 R7.1 TP7.TP U1.5 U2.7
N$1 [Signal]: J2.A5 R2-USB1.2
N$2 [Signal]: C1_BAT1.1 D2.1 IC4.1 IC4.3 Q1.2
N$3 [Signal]: MCP73831.1 R1_BAT.2
N$4 [Signal]: J2.B5 R2-USB.1
N$5 [Signal]: CHG_LED.C R1_BAT.1
N$6 [Signal]: C4.1 D3.2 D4.1
N$7 [Signal]: EPD_C12.2 J1.24
N$8 [Signal]: MCP73831.5 R2_BAT.2
N$9 [Signal]: C_DELAY.1 IC1.5
N$10 [Signal]: EPD_C10.2 J1.22
N$11 [Signal]: EPD_C8.2 J1.20
N$12 [Signal]: D7.1 R_CAPACITOR.1
N$13 [Signal]: EPD_C7.2 J1.19
N$14 [Signal]: EPD_C6.2 J1.18
N$22 [Signal]: EPD_C2.2 J1.5
N$23 [Signal]: EPD_C1.2 J1.4
PREVGH [Signal]: D5.1 EPD_C9.2 J1.21
PREVGL [Signal]: D4.2 EPD_C11.2 J1.23
RESE [Signal]: J1.3 Q3.2 R3.2
RESE' [Signal]: R2.2 R3.1 SJ1.2
RESET [Signal]: C5.1 IC1.1 R_RESET.1 RESET_BUTTON.3 RESET_BUTTON.4 U2.3
RTC_RST [Signal]: U2.16 U3.4
RX [Signal]: TP2.TP U2.24
SCK [Signal]: D10.2 J1.13 J4.P5 R6.1 TP8.TP U1.6 U2.6
SCL [Signal]: J3.4 R2_PINH.1 SENSOR2.4 U2.20 U3.16 U4.7
SDA [Signal]: J3.3 R1_PINH.1 SENSOR2.3 U2.19 U3.15 U4.8
SRC [Signal]: C4.2 D5.2 L1.1 Q3.3
SS_SD [Signal]: D8.2 J4.P2 R10.1 U2.4
TX [Signal]: TP1.TP U2.25
USB_D+ [Signal]: D1.1 U2.14
USB_D- [Signal]: D1.3 U2.13
VBAT [Power]: C2_BAT.1 MCP73831.3 Q1.3 TP3.TP U4.2 U4.3
VBUS [Power]: C1_BAT.1 C4_USB.1 C5_USB.1 CHG_LED.A D1.5 D2.2 MCP73831.4 PFMF.050.1.2 Q1.1 R1_PWRUSB.2 TP14.TP
VRTC [Signal]: C8.1 C10_SUPERCAP.2 R_CAPACITOR.2 U3.14
VUSB [Power]: J2.A4 J2.A9 J2.B4 J2.B9 PFMF.050.1.1

## Tracks (layer width: path | path; a pad name or v marks a point on that pad's centre or on a via)
3V3  (via drill 0.5)
  Top 0.3: 48.57,108.15 42.44,108.15 41.74,107.45 R_BOOT.2 31.86,107.45 29.32,104.91 18.03,104.91 | 48.57,108.15 51.63,108.15 53.03,106.75 57.58,106.75 58.11,107.28 58.72,107.28 R_CHARGE.2 | 18.03,104.91 18.03,106.4 18.73,107.1 19.08,107.1 R_RESET.2 | 18.03,104.91 18.03,100.01 15.93,97.91 10.51,97.91 8.67,99.75 C9.1 5.87,99.66 v5.87,98.88 | v4.64,91.35 5.43,90.56 5.69,90.56 J4.P4 | 36.49,63.26 39.64,60.11 40.34,60.11 40.52,59.94 40.52,59.15 39.82,58.45 U1.3 | 36.49,63.26 32.64,67.11 28.36,67.11 27.92,66.67 27.92,65.54 33.17,60.29 33.17,50.75 R8.2 | 46.99,65.28 46.99,61.51 47.52,60.99 U1.8 47.61,60.81 47.61,59.67 U1.7 | 46.99,65.28 46.99,65.97 | 46.99,65.97 46.99,100.54 47.52,101.06 47.69,101.06 IC1.2 47.78,101.06 48.39,101.67 48.39,102.46 48.22,102.64 v48.22,102.9 | 36.49,63.26 38.51,65.28 46.99,65.28 | 134.67,42.61 v131.96,42.61 131.61,42.61 130.38,41.39 C3.+ | 134.67,42.61 135.28,42.61 C1_BAT2.1 | v128.02,46.55 126.01,46.55 IC4.5 | v154.44,20.12 155.76,18.81 164.51,18.81 J3.2 | 134.67,42.61 134.67,44.36 134.84,44.54 135.89,44.54 136.86,43.58 140.79,43.58 TP16.TP | 20.66,43.4 22.84,43.4 32.38,33.86 41.74,33.86 R7.2 41.92,33.77 45.77,33.77 R5.2 45.86,33.77 47.52,33.77 47.78,33.51 49.53,33.51 R6.2 49.71,33.51 52.07,33.51 v52.16,33.6 | 20.66,43.4 19.69,43.4 R1.2 | v11.82,43.49 9.11,46.2 9.11,46.38 U2.2 | v20.66,43.49 20.66,43.4 | v88.29,61.86 90.83,61.86 R1_PINH1.2 | v85.76,62.04 85.76,60.73 85.49,60.46 U3.2 | D7.2 85.41,66.76 85.41,66.59 v84.71,65.89 84.62,65.97 46.99,65.97 | R10.2 57.06,17.06 60.91,17.06 62.66,15.31 62.83,15.31 R9.2 62.57,15.57 v64.49,17.5
  Top 0.3: v64.49,21.26 68.61,25.38 68.61,28.61 70.44,30.45 R_CL1.2 70.53,30.54 70.79,30.27 76.57,30.27 Q2.3 76.66,30.36 76.66,38.33 85.23,46.9 R2_PINH1.2 85.32,46.99 87.24,48.91 | 87.24,48.91 v87.24,53.81 | 87.24,48.91 v89.52,46.64 | v48.57,108.06 48.57,108.15
  Bottom 0.3: v4.64,91.35 4.64,97.65 v5.87,98.88 | v154.44,20.12 v131.96,42.61 v128.02,46.55 127.93,46.64 v89.52,46.64 | v20.66,43.49 v11.82,43.49 | v84.71,65.89 84.71,63.09 v85.76,62.04 85.93,61.86 v88.29,61.86 88.29,54.86 v87.24,53.81 | v64.49,17.5 v64.49,21.26 v52.16,33.6 | v48.57,108.06 48.57,103.25 v48.22,102.9
32KHZ
  Top 0.3: U3.1 86.81,60.46 86.81,61.34 88.03,62.56 88.03,64.66 87.94,64.75 86.98,64.75 86.89,64.66 86.89,63.7 86.63,63.44 86.19,63.44 84.97,62.21 84.97,59.5 83.48,58.01 83.48,50.23 83.92,49.79 83.92,46.9 R2_PINH1.1 83.83,46.81 76.48,46.81 62.57,32.9 47.87,32.9 47.34,33.42 46.56,33.42 46.29,33.16 41.48,33.16 41.13,33.51 27.22,33.51 18.03,42.7 18.03,46.38 U2.9
DN
  Top 0.3: J2.B7 163.11,53.55 162.84,53.81 | 162.84,53.81 162.84,54.25 163.11,54.51 163.63,54.51 J2.A7 | D1.4 153.04,51.98 160.57,51.98 162.32,53.73 162.76,53.73 162.84,53.81
DP
  Top 0.3: J2.A6 163.72,54.08 164.24,54.08 164.51,54.34 164.51,54.77 164.24,55.04 163.72,55.04 J2.B6 163.63,54.95 163.02,54.95 161.88,53.81 153.04,53.81 D1.6
EPD_3V3  (via drill 0.5)
  Top 0.3: J1.16 81.38,14.88 81.82,14.88 J1.15 81.73,14.96 81.73,17.06 v82.69,18.02 | v75.87,29.31 74.56,29.31 Q2.2 | C7.1 81.91,28.35 v81.91,29.31 81.99,29.4 82.69,29.4 82.96,29.66 83.04,29.66 87.68,34.3 | 87.68,34.3 86.72,35.26 86.37,35.26 L1.2 86.37,35.44 83.57,38.24 83.57,41.74 84.18,42.35 94.68,42.35 TP17.TP | 87.68,34.3 92.14,29.84 92.14,28.79 87.51,24.15 87.51,20.48 88.12,19.86 88.12,19.69 EPD_C5.2
  Bottom 0.3: v75.87,29.31 v81.91,29.31 82.69,28.52 v82.69,18.02
EPD_3V3_C  (via drill 0.5)
  Top 0.3: v71.58,29.31 70.53,29.31 R_CL1.1 | Q2.1 v73.42,31.15 73.33,31.24 73.33,36.05 72.72,36.66 TP13.TP 72.63,36.84 72.28,37.19 v67.82,37.19 | v20.92,65.28 20.57,64.92 20.57,63.96 U2.18
  Bottom 0.3: v73.42,31.15 v71.58,29.31 | v20.92,65.28 21.62,65.97 22.14,65.97 24.59,63.52 37.98,63.52 64.32,37.19 v67.82,37.19
EPD_BUSY  (via drill 0.5)
  Top 0.3: v81.82,12.51 85.14,12.51 85.58,12.95 85.58,13.47 84.88,14.18 84.88,14.79 J1.9 84.88,14.96 84.88,16.1 v83.74,17.24 | v60.47,12.51 59.07,11.11 16.11,11.11 11.12,16.1 TP9.TP | v29.06,78.92 20.83,78.92 10.42,68.51 10.42,63.96 U2.26
  Bottom 0.3: v60.47,12.51 v81.82,12.51 | v29.06,78.92 29.06,78.49 48.48,59.06 53.12,59.06 83.74,28.44 v83.74,17.24
EPD_CS  (via drill 0.5)
  Top 0.3: 41.92,35.7 43.06,36.84 45.42,36.84 D6.2 | 41.92,35.7 31.07,35.7 20.57,46.2 20.57,46.38 U2.11 | v84.18,15.84 83.92,15.84 83.39,15.31 83.39,14.88 J1.12 | v98.88,15.84 100.28,15.84 100.37,15.93 TP10.TP | v71.23,14.61 62.39,14.61 61.78,15.22 61.61,15.22 R9.1 61.43,15.22 56.97,15.22 56.09,14.35 56.09,13.3 v55.57,12.78 | v42.01,34.74 42.01,35.61 41.92,35.7
  Bottom 0.3: v98.88,15.84 v84.18,15.84 82.96,14.61 v71.23,14.61 | v42.01,34.74 42.01,26.34 v55.57,12.78
EPD_DC  (via drill 0.5)
  Top 0.3: v82.61,13.21 83.83,14.44 83.83,14.79 J1.11 | v72.46,13.21 71.84,13.21 71.14,12.51 TP11.TP | v56.01,24.5 34.57,24.5 12.96,46.11 12.96,46.38 U2.5
  Bottom 0.3: v82.61,13.21 v72.46,13.21 72.37,13.3 67.21,13.3 v56.01,24.5
EPD_RST  (via drill 0.5)
  Top 0.3: v84.88,13.21 84.36,13.74 84.36,14.79 J1.10 | v91.88,13.21 92.93,12.16 TP12.TP | v19.26,67.72 16.81,65.28 16.81,63.96 U2.21 | v26.61,67.11 26.61,65.8 v32.47,59.94
  Bottom 0.3: v91.88,13.21 v84.88,13.21 82.78,11.11 58.54,11.11 54.26,15.4 54.26,23.54 45.77,32.02 45.77,32.99 39.73,39.02 39.73,49.96 32.47,57.23 v32.47,59.94 | v19.26,67.72 25.99,67.72 v26.61,67.11
FLASH_CS  (via drill 0.5)
  Top 0.3: v46.82,32.73 46.56,32.46 45.86,32.46 R5.1 | v69.31,26.95 69.31,25.9 D9.2 | v40.87,56 40.87,60.11 40.08,60.9 39.82,60.9 U1.1 | v40.78,45.15 22.84,45.15 21.88,46.11 21.88,46.38 U2.12
  Bottom 0.3: v46.82,32.73 46.82,33.6 49.53,36.31 | 49.53,36.31 51.63,36.31 60.99,26.95 v69.31,26.95 | 40.87,45.15 40.87,44.98 49.53,36.31 | 40.87,45.15 v40.87,56 | v40.78,45.15 40.87,45.15
GDR  (via drill 0.5)
  Top 0.3: v88.29,13.91 88.29,14.79 J1.2 | 62.39,22.93 62.39,24.59 62.48,24.68 R4.2 | 62.39,22.93 v62.39,22.4 | 62.39,22.93 58.19,22.93 57.49,22.23 57.32,22.23 Q3.1
  Bottom 0.3: v88.29,13.91 67.12,13.91 62.39,18.64 v62.39,22.4
GND  (via drill 0.35, 0.5)  (1 unrouted)
  Top 0.3: U2.29_1 12.34,52.5 12.34,53.64 U2.29_2 | U2.29_1 12.43,52.5 13.48,52.5 U2.29_4 13.66,52.5 14.79,52.5 U2.29_7 14.79,52.59 14.79,53.64 U2.29_8 14.79,53.81 14.79,54.86 U2.29_9 | U2.29_5 13.48,53.73 12.43,53.73 U2.29_2 | U2.29_2 12.34,53.81 12.34,54.86 U2.29_3 12.43,54.95 13.48,54.95 U2.29_6 | 48.92,104.3 48.92,101.24 47.87,100.19 47.69,100.19 IC1.3 | 48.92,104.3 U$2.1 | 54.17,102.55 U$2.2 50.76,105.79 49.36,104.39 49.01,104.39 48.92,104.3 | 54.17,102.55 54.87,101.85 54.87,101.41 C_DELAY.2 | 54.17,102.55 56.97,105.35 | 56.97,105.35 58.28,106.66 59.24,106.66 59.51,106.92 59.51,107.8 59.33,107.97 58.28,107.97 57.67,107.36 54.69,107.36 C6.2 54.61,107.45 52.86,107.45 51.54,108.76 31.68,108.76 29.41,106.49 | TP4.TP TP5.TP 78.41,107.71 71.67,107.71 70.27,106.31 | 70.27,106.31 69.66,106.92 69.66,107.1 C10.2 | 70.27,106.31 70.27,105.44 70.09,105.26 66.51,105.26 65.89,105.88 CHANGE_BUTTON.2 65.72,105.88 62.39,105.88 CHANGE_BUTTON.1 62.22,105.88 60.91,104.56 57.76,104.56 56.97,105.35 | U2.28 7.79,63.96 7.79,76.65 2.11,82.34 J4.G3 2.11,82.51 2.11,87.24 4.82,89.95 | 4.82,89.95 6.57,89.95 6.92,90.3 6.92,92.05 6.31,92.66 5.78,92.66 J4.P6 | 4.82,89.95 3.07,91.7 J4.G4 3.16,95.64 3.33,95.81 5.17,95.81 | 5.17,95.81 16.28,95.81 17.86,94.24 17.86,92.22 16.63,91 J4.G2 16.37,91.09 17.16,90.3 17.16,87.24 16.37,86.45 16.37,85.4 J4.G1 16.46,85.31 v19.69,85.31 | 29.41,106.49 28.71,107.19 C5.2 | 29.41,106.49 29.41,105.53 29.23,105.35 26.43,105.35 25.91,105.88 RESET_BUTTON.2 25.73,105.88 22.41,105.88 RESET_BUTTON.1 22.23,105.79 21.01,105.79 20.48,105.26 18.56,105.26 18.38,105.44 18.38,106.22 18.73,106.58 19.61,106.58 19.78,106.75 19.78,107.62 19.69,107.71 15.14,107.71 8.76,101.33 8.76,101.06 8.67,100.97
  Top 0.3: SJ1.1 14.01,99.92 9.72,99.92 R2.1 9.63,100.01 8.67,100.97 | 8.67,100.97 5.96,100.97 C9.2 5.87,100.89 5.17,100.19 5.17,95.81 | 40.61,55.3 39.82,56.09 39.82,57.05 U1.4 | 40.61,55.3 41.13,55.3 43.67,57.84 43.67,58.98 U1.9 | U1.9 43.76,57.75 49.27,52.24 51.19,52.24 51.63,51.8 51.63,51.27 41.92,41.56 41.92,38.5 D11.1 42.01,38.41 v42.88,38.41 | D12.1 37.54,49.52 37.54,49.7 40.52,52.67 40.52,55.21 40.61,55.3 | v44.46,37.8 44.89,38.24 45.42,38.24 D6.1 45.51,38.33 45.68,38.15 D8.1 v50.76,38.15 | J1.17 80.77,14.79 80.77,14.44 78.76,12.43 76.39,12.43 J1.MP2 76.31,12.51 70.71,18.11 70.71,19.77 | 70.71,19.77 71.32,20.39 EPD_C12.1 71.41,20.48 74.29,20.48 EPD_C11.1 74.38,20.56 74.38,26.77 79.72,32.11 79.72,40.08 D3.1 80.86,41.21 81.99,41.21 85.76,44.98 | 63.18,25.99 67.73,25.99 67.82,25.9 D9.1 | 63.18,25.99 62.57,25.99 R4.1 62.39,25.99 58.54,25.99 | 55.39,15.66 55.39,13.82 D10.1 | 55.39,15.66 56.36,16.62 56.36,19.51 52.86,23.01 52.86,23.54 53.29,23.98 55.57,23.98 55.74,23.8 56.36,23.8 58.54,25.99 | 55.39,15.66 55.31,15.75 38.24,15.75 7.88,46.11 7.88,46.38 U2.1 7.83,47.98 U2.29_1 | 70.71,19.77 63.27,19.77 63.09,19.95 63.09,24.24 63.18,24.32 63.18,25.99 | v58.46,30.45 58.46,26.07 58.54,25.99 | D1.2 150.86,52.85 151.38,53.38 151.38,54.16 149.02,56.52 147.97,56.52 R2-USB1.1 147.79,56.61 147.79,56.88 147.27,57.4 147.27,58.27 147.44,58.45 155.76,58.45 156.02,58.19 R2-USB.2 156.19,58.1 163.19,58.1 | 163.19,58.1 163.63,57.66 J2.A12 | J2.B1 163.72,57.4 163.72,57.58 J2.A12 | 163.19,58.1 164.24,59.15 164.24,59.33 J2.MP4 164.42,59.41 168.18,59.41 J2.MP2 | SENSOR2.5 152.69,14.26 152.69,13.21 150.07,10.59 150.07,9.71 150.24,9.54 154.36,9.54 154.79,9.97 C1.2 154.97,10.06 157.94,10.06 158.03,10.15 C2.2 158.21,10.24 164.51,16.54 164.51,17.76 J3.1 164.59,17.85 164.86,17.85 165.47,18.46 165.47,49.17
  Top 0.3: 150.68,46.55 153.31,46.55 153.48,46.38 C5_USB.2 153.66,46.46 158.12,46.46 162.58,50.92 163.54,50.92 J2.A1 | 150.68,46.55 C4_USB.2 | J2.A1 163.72,51.01 163.72,51.19 J2.B12 | J2.A1 163.81,50.84 163.81,49.7 164.24,49.26 J2.MP3 164.42,49.17 165.47,49.17 | 165.47,49.17 168.18,49.17 J2.MP1 | J2.A12 163.81,57.75 164.94,57.75 165.29,57.4 165.29,51.19 165.03,50.92 163.89,50.92 J2.A1 | C3.- 130.29,44.36 125.66,39.73 124.87,39.73 124.17,40.42 123.99,40.42 C1_BAT1.2 123.82,40.51 121.11,40.51 118.74,42.88 118.74,43.84 119.71,44.8 121.02,44.8 122.42,46.2 | 122.42,46.2 122.94,45.67 123.12,45.67 IC4.2 | 122.42,46.2 122.42,47.77 C2_BAT.2 125.83,51.1 127.76,51.1 129.16,52.5 129.16,53.2 128.63,53.73 128.37,53.73 MCP73831.2 128.28,53.81 128.02,53.81 127.49,54.34 127.49,55.12 | U4.4 137.29,55.39 137.56,55.39 138.26,56.09 U4.9 | U4.6 139.13,55.91 138.26,55.91 U4.9 | 137.56,56.79 137.29,56.79 U4.1 | 137.56,56.79 138.17,56.17 U4.9 | 127.49,55.12 127.67,55.3 132.57,55.3 133.01,55.74 133.01,56.52 132.31,57.23 132.31,57.4 C1_BAT.2 132.31,57.58 132.31,58.62 137.03,63.35 137.91,63.35 138.69,62.56 138.69,58.62 137.64,57.58 137.64,56.88 137.56,56.79 | 88.91,21 90.48,21 EPD_C2.1 90.57,21.18 92.76,21.18 EPD_C1.1 92.93,21.09 93.54,20.48 | 88.91,21 88.21,21 EPD_C5.1 | 93.54,20.48 93.54,19.34 89.87,15.66 89.87,12.43 J1.MP1 | EPD_C10.1 77.36,20.56 79.98,20.56 EPD_C9.1 80.07,20.65 81.91,20.65 82.26,21 EPD_C8.1 82.43,21 83.31,21 | 86.63,19.16 86.72,19.25 86.72,20.21 86.02,20.91 EPD_C6.1 85.84,20.91 84.36,20.91 EPD_C7.1 84.27,21 83.31,21 | 86.63,19.16 85.41,17.94 85.41,14.88 J1.8
  Top 0.3: 83.31,21 83.31,28.26 C7.2 | 88.91,21 88.91,19.25 88.73,19.07 86.72,19.07 86.63,19.16 | C8.2 90.66,53.81 93.81,53.81 C10_SUPERCAP.1 94.24,54.08 95.29,53.02 95.29,51.36 | 85.76,44.98 86.72,45.94 89.87,45.94 95.29,51.36 | v82.87,49.61 82.87,51.1 U3.13 | 85.76,44.98 v85.32,45.41 | 150.33,16.1 150.33,15.31 151.03,14.61 151.03,14.35 SENSOR2.7 | 150.33,16.1 150.33,17.24 SENSOR2.1 | 116.12,47.6 116.12,44.8 R1_PWRUSB.1 116.03,44.62 115.33,43.92 115.33,43.05 115.73,42.66 | 116.12,47.6 119.62,51.1 R2_BAT.1 | 136.07,42.26 136.07,43.05 135.37,43.75 135.37,43.92 C1_BAT2.2 | 132.83,39.02 136.07,42.26 | 132.83,39.02 119.36,39.02 115.73,42.66 | 150.33,16.1 143.94,16.1 132.92,27.12 132.92,38.94 132.83,39.02 | 112.44,51.27 95.38,51.27 95.29,51.36 | 116.12,47.6 112.44,51.27 | 115.73,42.66 93.54,20.48 | 127.49,55.12 127.41,55.21 126.97,55.21 125.31,56.88 117.26,56.88 112.53,52.15 112.53,51.36 112.44,51.27 | 150.68,46.55 150.68,39.73 150.59,39.64 148.84,39.64 145.17,43.31 145.17,45.15 144.73,45.59 144.21,45.59 142.02,43.4 142.02,42.96 141.32,42.26 136.07,42.26 | v41.48,61.16 43.58,59.06 U1.9
  Bottom 0.3: v44.46,37.8 43.49,37.8 v42.88,38.41 | v58.46,30.45 v50.76,38.15 | v82.87,49.61 82.87,49.44 82.34,48.91 82.34,48.39 v85.32,45.41 | v19.69,85.31 20.04,85.31 41.48,63.88 v41.48,61.16
  other vias: 41.09,73.7 29.99,52.7 44.09,53.9 64.99,44.5 68.69,21.9 56.49,19.6 54.19,28.3 18.99,72.3 11.99,92.6 62.69,13.6 70.79,33.3 53.49,61.8 69.09,60.5 36.19,62.5 52.09,56.9 25.89,37.4 36.39,32.1 37.29,34.8 44.09,32.2 92.29,32.8 87.79,31.3 79.19,25 67.79,16.5 70.59,27.4 59.99,19.3
  pour Top: 7.16,45.46 7.14,45.44 7.11,45.42 0.17,45.42 0.17,0.08 74.02,0.08 74.02,10.02 74.03,10.04 74.05,10.06 74.08,10.08 92.31,10.08 92.34,10.06 92.36,10.04 92.37,10.02 92.37,0.08 170.22,0.08 170.22,67.12 92.28,67.12 92.25,67.14 92.23,67.16 92.22,67.18 92.22,111.12 70.17,111.12 70.17,108.98 70.16,108.96 70.14,108.94 70.11,108.92 18.08,108.92 18.05,108.94 18.03,108.96 18.02,108.98 18.02,111.12 0.17,111.12 0.17,64.98 7.11,64.98 7.14,64.96 7.16,64.94 7.17,64.92 7.17,45.48
  pour Bottom: 7.16,45.46 7.14,45.44 7.11,45.42 0.17,45.42 0.17,0.08 74.02,0.08 74.02,10.02 74.03,10.04 74.05,10.06 74.08,10.08 92.31,10.08 92.34,10.06 92.36,10.04 92.37,10.02 92.37,0.08 170.22,0.08 170.22,67.12 92.28,67.12 92.25,67.14 92.23,67.16 92.22,67.18 92.22,111.12 70.17,111.12 70.17,108.98 70.16,108.96 70.14,108.94 70.11,108.92 18.08,108.92 18.05,108.94 18.03,108.96 18.02,108.98 18.02,111.12 0.17,111.12 0.17,64.98 7.11,64.98 7.14,64.96 7.16,64.94 7.17,64.92 7.17,45.48
GPIO8
  Top 0.3: R1.1 19.69,42.35 18.99,43.05 18.99,46.11 19.26,46.38 U2.10
I2C_PW  (via drill 0.5)
  Top 0.3: C2.1 158.03,8.84 157.94,8.75 C1.1 154.79,8.84 150.86,8.84 R2_PINH.2 150.68,8.93 150.33,8.93 149.72,9.54 149.72,12.43 150.86,13.56 | 150.86,13.56 151.38,13.56 151.82,14 151.82,14.26 SENSOR2.6 151.82,14.44 151.82,14.7 151.12,15.4 151.12,17.24 SENSOR2.2 | 150.86,13.56 150.42,14 150.42,14.26 SENSOR2.8 150.24,14.35 149.28,15.31 144.56,15.31 R1_PINH.2 144.38,15.31 139.83,10.76 76.04,10.76 68.61,18.2 60.12,18.2 55.04,23.27 v53.56,23.27 | v21.88,65.28 21.88,63.96 U2.17
  Bottom 0.3: v21.88,65.28 22.32,65.28 24.42,63.17 25.99,63.17 39.38,49.79 39.38,38.85 45.42,32.81 45.42,31.41 v53.56,23.27
INT_RTC  (via drill 0.5)
  Top 0.3: TP15.TP 96.96,64.75 92.76,60.55 R1_PINH1.1 90.83,60.46 v87.59,60.46 | v17.33,45.15 16.81,45.67 16.81,46.38 U2.8 | v38.68,40.34 41.31,37.71 43.41,37.71 64.49,58.8 82.87,58.8 83.35,59.28 | 83.35,59.28 84.18,60.11 84.18,60.38 U3.3 | 83.35,59.28 v83.57,59.06
  Bottom 0.3: v17.33,45.15 33.87,45.15 v38.68,40.34 | v87.59,60.46 84.97,60.46 v83.57,59.06
IO/BOOT
  Top 0.3: C6.1 52.24,106.05 50.84,107.45 U$2.3 50.76,107.36 47.43,107.36 U$2.4 47.34,107.45 46.12,106.22 43.58,106.22 | 43.58,106.22 41.74,106.22 R_BOOT.1 | 43.58,106.22 43.58,105.26 45.94,102.9 45.94,92.58 24.42,71.05 24.42,63.96 U2.15
IO/CHARGE  (via drill 0.5)
  Top 0.3: C10.1 69.57,105.88 67.38,105.88 65.89,107.36 CHANGE_BUTTON.3 65.72,107.36 62.48,107.36 CHANGE_BUTTON.4 62.31,107.36 60.99,106.05 R_CHARGE.1 58.72,105.96 v58.02,105.26 | v14.18,67.81 14.18,63.96 U2.23
  Bottom 0.3: v14.18,67.81 14.18,81.55 7.71,88.03 7.71,91.61 18.29,102.2 54.96,102.2 v58.02,105.26
MISO  (via drill 0.5)
  Top 0.3: R8.1 33.26,49.52 36.06,49.52 37.46,50.92 D12.2 37.46,51.1 37.46,59.67 | 37.46,59.67 35.53,59.67 32.12,63.09 TP6.TP 31.94,63.09 v28.62,66.41 | 37.46,59.67 39.73,59.67 U1.2 | 9.11,67.03 9.11,90.74 6.04,93.8 J4.P7 | 9.11,67.03 9.11,63.96 U2.27 | v9.19,67.03 9.11,67.03
  Bottom 0.3: v28.62,66.41 24.16,66.41 23.54,67.03 v9.19,67.03
MOSI  (via drill 0.5)
  Top 0.3: v48.83,57.05 47.61,57.05 U1.5 | v52.86,53.02 54.78,53.02 TP7.TP | v8.41,89.34 5.96,89.34 J4.P3 | J1.14 82.34,16.71 v82.43,16.8 | v68.34,31.41 43.06,31.41 41.92,32.55 R7.1 41.83,32.64 41.66,32.81 v40.87,32.81 | v40.87,36.4 41.39,36.92 41.83,36.92 D11.2 | v17.33,44.19 15.49,46.02 15.49,46.38 U2.7
  Bottom 0.3: v8.41,89.34 16.63,89.34 48.83,57.14 v48.83,57.05 v52.86,53.02 67.99,37.89 68.08,37.89 68.52,37.45 68.52,31.41 v68.34,31.41 82.43,17.32 v82.43,16.8 | v40.87,32.81 v40.87,36.4 33.08,44.19 v17.33,44.19
N$1  (via drill 0.5)
  Top 0.3: v161.09,54.51 157.33,54.51 154.01,57.84 147.97,57.84 R2-USB1.2 | v162.58,53.02 163.63,53.02 J2.A5
  Bottom 0.3: v162.58,53.02 v161.09,54.51
N$2
  Top 0.3: C1_BAT1.1 125.22,40.51 125.22,42.61 123.21,44.62 IC4.3 | D2.1 119.44,43.4 121.81,43.4 123.03,44.62 IC4.3 | 123.82,46.02 123.64,46.2 123.56,46.2 123.21,46.55 IC4.1 | 123.82,46.02 123.82,45.24 123.29,44.71 IC4.3 | 123.82,46.02 127.58,49.79 134.14,49.79 134.84,49.09 135.46,49.09 Q1.2
N$3
  Top 0.3: MCP73831.1 128.02,52.85 127.14,53.73 127.14,54.51 125.13,56.52 120.32,56.52 118.31,54.51 117.34,54.51 R1_BAT.2
N$4
  Top 0.3: R2-USB.1 156.19,56.79 162.41,56.79 163.11,56.09 163.63,56.09 J2.B5
N$5
  Top 0.3: R1_BAT.1 116.73,53.81 118.13,53.81 120.14,55.83 121.28,55.83 CHG_LED.C
N$6
  Top 0.3: C4.1 93.63,33.95 91.44,36.14 D4.1 91.36,36.31 86.54,41.12 84.36,41.12 D3.2
N$7
  Top 0.3: J1.24 77.27,14.88 75.78,14.88 71.41,19.25 EPD_C12.2
N$8
  Top 0.3: R2_BAT.2 123.91,51.1 125.66,52.85 MCP73831.5
N$9
  Top 0.3: C_DELAY.1 54.87,100.1 52.42,100.1 50.49,102.03 IC1.5
N$10
  Top 0.3: J1.22 78.32,14.88 78.32,18.29 77.36,19.25 EPD_C10.2
N$11
  Top 0.3: J1.20 79.37,14.88 79.37,16.71 82.34,19.69 EPD_C8.2
N$12
  Top 0.3: D7.1 86.19,65.45 86.19,64.14 R_CAPACITOR.1
N$13
  Top 0.3: J1.19 79.89,14.88 79.89,16.19 82.87,19.16 83.92,19.16 84.27,19.51 EPD_C7.2
N$14  (via drill 0.5)
  Top 0.3: v81.03,15.93 80.42,15.31 80.42,14.88 J1.18 | v85.23,18.9 85.93,19.6 EPD_C6.2
  Bottom 0.3: v81.03,15.93 83.31,15.93 83.92,16.54 84.01,16.54 85.23,17.76 v85.23,18.9
N$22
  Top 0.3: J1.5 86.89,14.88 86.89,16.1 90.48,19.69 EPD_C2.2
N$23
  Top 0.3: J1.4 87.42,14.88 87.42,15.31 91.88,19.77 92.84,19.77 EPD_C1.2
PREVGH
  Top 0.3: J1.21 78.84,18.11 79.19,18.46 | 79.19,18.46 79.98,19.25 EPD_C9.2 | 79.19,18.46 77.79,19.86 76.83,19.86 76.57,20.12 76.57,20.91 82.52,26.86 82.52,28.7 83.04,29.23 91.27,29.23 D5.1
PREVGL
  Top 0.3: J1.23 77.79,14.88 77.79,15.57 74.29,19.07 EPD_C11.2 74.38,19.25 74.99,19.86 74.99,22.49 80.07,27.56 80.07,38.76 84.97,43.66 95.21,43.66 95.91,42.96 95.91,41.91 94.94,40.95 D4.2
RESE
  Top 0.3: J1.3 87.77,14.79 87.77,14.44 84.44,11.11 76.22,11.11 68.34,18.99 63.79,18.99 R3.2 63.71,19.16 63.36,19.16 60.38,22.14 58.54,22.14 Q3.2
RESE'  (via drill 0.5)
  Top 0.3: v73.51,28.79 65.11,20.39 63.79,20.39 R3.1 | v15.67,98.61 15.67,99.84 15.58,99.92 SJ1.2 15.67,100.1 14.62,101.15 R2.2
  Bottom 0.3: v73.51,28.79 73.51,30.27 74.12,30.89 74.12,32.38 53.56,52.94 53.56,53.29 48.48,58.36 48.13,58.36 15.67,90.83 v15.67,98.61
RESET  (via drill 0.5)
  Top 0.3: R_RESET.1 19.17,105.88 20.57,105.88 22.06,107.36 22.32,107.36 RESET_BUTTON.4 22.41,107.36 25.73,107.36 RESET_BUTTON.3 25.91,107.36 27.31,105.96 27.66,105.96 | 27.66,105.96 28.62,105.96 C5.1 | v44.28,105.53 47.69,102.11 IC1.1 47.52,102.11 46.64,101.24 46.64,92.75 25.91,72.01 25.91,65.97 26.69,65.19 v26.69,61.51 | v27.66,106.05 27.66,105.96 | v11.38,45.15 10.42,46.11 10.42,46.38 U2.3
  Bottom 0.3: v44.28,105.53 28.18,105.53 v27.66,106.05 | v11.38,45.15 16.37,45.15 18.56,47.34 26.52,47.34 26.69,47.51 v26.69,61.51
RTC_RST  (via drill 0.5)
  Top 0.3: v23.72,65.89 23.11,65.28 23.11,63.96 U2.16 | v38.86,64.58 41.57,61.86 44.98,61.86 46.91,59.94 46.91,56.61 50.93,52.59 51.46,52.59 52.68,53.81 53.91,53.81 59.24,59.15 81.99,59.15 82.87,60.02 82.87,60.38 U3.4
  Bottom 0.3: v23.72,65.89 28.18,65.89 29.49,64.58 v38.86,64.58
RX
  Top 0.3: U2.24 12.96,63.96 12.96,68.78 TP2.TP
SCK  (via drill 0.5)
  Top 0.3: U1.6 47.61,58.36 v49.44,58.36 52.42,58.36 54.17,56.61 TP8.TP | v17.16,92.49 15.93,92.49 12.96,95.46 5.08,95.46 4.73,95.11 4.73,92.22 5.34,91.61 5.87,91.61 J4.P5 | v80.16,11.81 82.78,14.44 82.78,14.79 J1.13 | v58.81,11.81 56.88,13.74 D10.2 | v50.58,32.11 49.62,32.11 R6.1 | v50.49,30.71 29.49,30.71 14.27,45.94 14.27,46.38 U2.6 | v57.06,50.4 52.16,45.5 v52.16,34.56
  Bottom 0.3: v17.16,92.49 17.16,89.86 48.31,58.71 49.09,58.71 v49.44,58.36 49.53,58.27 49.53,57.92 v57.06,50.4 | v80.16,11.81 v58.81,11.81 58.72,11.9 58.72,20.65 50.58,28.79 50.58,30.71 | 50.58,30.71 v50.58,32.11 50.67,32.2 50.67,33.08 v52.16,34.56 | v50.49,30.71 50.58,30.71
SCL  (via drill 0.5)
  Top 0.3: U4.7 139.48,56.35 139.83,56 v139.83,48.56 | 152.69,20.82 SENSOR2.4 152.78,17.15 153.22,16.71 153.22,13.21 150.86,10.85 150.86,10.15 R2_PINH.1 | 152.69,20.82 v152.69,35.7 | 152.69,20.82 164.51,20.82 J3.4 | v30.46,78.05 30.46,77.96 18.03,65.54 18.03,63.96 U2.20 | v86.11,52.67 86.11,51.8 86.72,51.19 U3.16
  Bottom 0.3: v152.69,35.7 v139.83,48.56 139.74,48.48 89.34,48.48 85.58,44.71 85.06,44.71 81.99,47.77 81.99,49.79 85.49,53.29 | v30.46,78.05 60.73,78.05 85.49,53.29 | v86.11,52.67 85.49,53.29
SDA  (via drill 0.5)
  Top 0.3: v141.14,55.21 139.57,56.79 139.22,56.79 U4.8 | 144.47,18.02 144.47,16.71 R1_PINH.1 | 144.47,18.02 v144.47,44.89 | 151.56,17.85 151.38,18.02 144.47,18.02 | 151.56,17.85 151.82,17.59 151.82,17.32 SENSOR2.3 | v155.76,19.77 164.51,19.77 J3.3 | 151.56,17.85 v151.99,18.29 | v21.01,66.33 19.34,64.66 19.34,63.96 U2.19 | v40.52,63.88 v46.29,63.88 | v84.53,53.29 84.53,52.41 85.41,51.54 85.41,51.19 U3.15 85.49,51.01 85.49,50.66 v86.54,49.61
  Bottom 0.3: 141.14,49.61 141.14,48.21 v144.47,44.89 | 141.14,49.61 v141.14,55.21 | v155.76,19.77 155.06,19.77 153.57,18.29 v151.99,18.29 | v21.01,66.33 22.32,66.33 24.77,63.88 v40.52,63.88 | v46.29,63.88 73.94,63.88 v84.53,53.29 | v86.54,49.61 141.14,49.61
SRC  (via drill 0.5)
  Top 0.3: C4.2 99.76,35.17 99.76,35 100.37,34.39 100.37,33.51 96.17,29.31 94.86,29.31 D5.2 94.77,29.4 v92.84,29.4 | v61.52,25.2 60.64,24.32 57.93,24.32 Q3.3 | v76.13,22.66 76.13,23.1 81.21,28.18 81.21,30.36 | 81.21,30.36 81.21,34.65 81.82,35.26 L1.1 | 81.21,30.36 v82.78,30.36
  Bottom 0.3: v61.52,25.2 73.59,25.2 v76.13,22.66 | v92.84,29.4 83.74,29.4 v82.78,30.36
SS_SD  (via drill 0.5)
  Top 0.3: v49.79,35.61 49.79,36.31 49.53,36.58 D8.2 | R10.1 55.74,17.15 v54.96,17.94 54.87,18.02 39.82,18.02 11.64,46.2 U2.4 | v8.41,88.29 6.39,88.29 J4.P2 | v31.42,65.28 31.68,65.28 v36.58,60.38
  Bottom 0.3: v54.96,17.94 54.96,23.89 49.79,29.05 49.79,32.02 | v49.79,35.61 49.79,32.02 | v31.42,65.28 v8.41,88.29 | v36.58,60.38 36.58,53.64 40.08,50.14 40.08,39.2 46.12,33.16 46.12,32.46 46.56,32.02 49.79,32.02
TX  (via drill 0.5)
  Top 0.3: U2.25 11.64,69.21 20.66,78.22 29.67,78.22 v45.24,93.8 | TP1.TP v75.69,93.8
  Bottom 0.3: v75.69,93.8 v45.24,93.8
USB_D+  (via drill 0.5)
  Top 0.3: v51.19,53.29 52.07,54.16 53.47,54.16 60.99,61.69 81.47,61.69 86.11,66.33 86.11,66.5 87.07,67.46 88.03,67.46 88.56,66.94 135.37,66.94 148.49,53.81 150.51,53.81 D1.1 | v50.93,51.54 40.87,51.54 36.14,46.81 24.77,46.81 24.42,46.46 U2.14
  Bottom 0.3: v51.19,53.29 51.19,51.8 v50.93,51.54
USB_D-  (via drill 0.5)
  Top 0.3: v145.34,51.98 150.51,51.98 D1.3 | v83.04,48.65 56.27,48.65 v54.08,46.46 | v41.57,46.46 25.91,46.46 24.94,45.5 23.81,45.5 23.11,46.2 23.11,46.38 U2.13
  Bottom 0.3: v145.34,51.98 141.41,55.91 90.31,55.91 v83.04,48.65 | v41.57,46.46 v54.08,46.46
VBAT
  Top 0.3: 129.51,52.33 126.97,49.79 125.74,49.79 C2_BAT.1 | 129.51,52.33 129.51,53.81 128.63,54.69 128.37,54.69 MCP73831.3 | 129.51,52.33 130.64,51.19 134.49,51.19 Q1.3 134.67,51.27 134.67,53.64 136.77,55.74 137.12,55.74 U4.3 137.21,55.91 U4.2 137.12,56.44 136.77,56.44 136.59,56.61 136.59,57.05 137.47,57.92 137.47,62.04 TP3.TP
VBUS
  Top 0.3: MCP73831.4 125.66,54.77 124.61,55.83 122.86,55.83 CHG_LED.A 122.77,55.74 122.77,54.08 120.23,51.54 120.23,46.38 119.44,45.59 D2.2 119.44,45.41 117.52,43.49 | 117.52,43.49 116.12,43.49 R1_PWRUSB.2 | 131.61,56.17 129.16,56.17 125.83,59.5 TP14.TP | 131.61,56.17 132.22,56.17 C1_BAT.1 | 135.54,47.86 134.41,49 133.71,49 Q1.1 | 148.49,47.86 149.11,47.86 C4_USB.1 149.28,47.77 149.37,47.69 152.17,47.69 | 148.49,47.86 141.84,47.86 | 141.84,47.86 135.54,47.86 | 152.17,47.69 153.48,47.69 C5_USB.1 | D1.5 152.78,52.85 152.17,52.24 152.17,47.69 | 148.49,47.86 148.49,46.11 149.63,44.98 149.63,41.65 PFMF.050.1.2 | 131.61,56.17 131.61,58.45 136.86,63.7 138.08,63.7 141.84,59.94 141.84,47.86 | 117.52,43.49 121.63,39.38 125.92,39.38 129.68,43.14 131.52,43.14 135.46,47.08 135.46,47.77 135.54,47.86
VRTC
  Top 0.3: 86.63,56.44 90.57,52.5 C8.1 90.66,52.33 90.74,52.24 94.33,52.24 C10_SUPERCAP.2 | 86.63,56.44 86.19,56.88 86.19,61.51 87.42,62.74 87.42,64.05 R_CAPACITOR.2 | 86.63,56.44 83.83,53.64 83.83,53.02 84.18,52.67 84.18,51.19 U3.14
VUSB  (via drill 0.5)
  Top 0.3: J2.A9 163.72,56.79 163.72,56.61 J2.B4 163.81,56.44 164.33,56.44 164.86,55.91 164.86,52.67 164.33,52.15 163.81,52.15 J2.B9 163.72,51.98 163.72,51.8 J2.A4 163.63,51.62 v162.58,51.62 | v162.58,49.96 154.27,41.65 PFMF.050.1.1
  Bottom 0.3: v162.58,49.96 v162.58,51.62